# Altium PCB VT 8S LHS Top V0.1.PcbDoc
Units mm, origin at the board's own origin, x right, y up, seen from the top; angles counter-clockwise.
Board outline 148.42 x 117.33 mm, 2 copper layers (Top Layer, Bottom Layer), stack 0.049 mm thick; 6 components, 5 nets, 17 pads, 30 vias.
Unrouted connection lines stored in the file: 5.
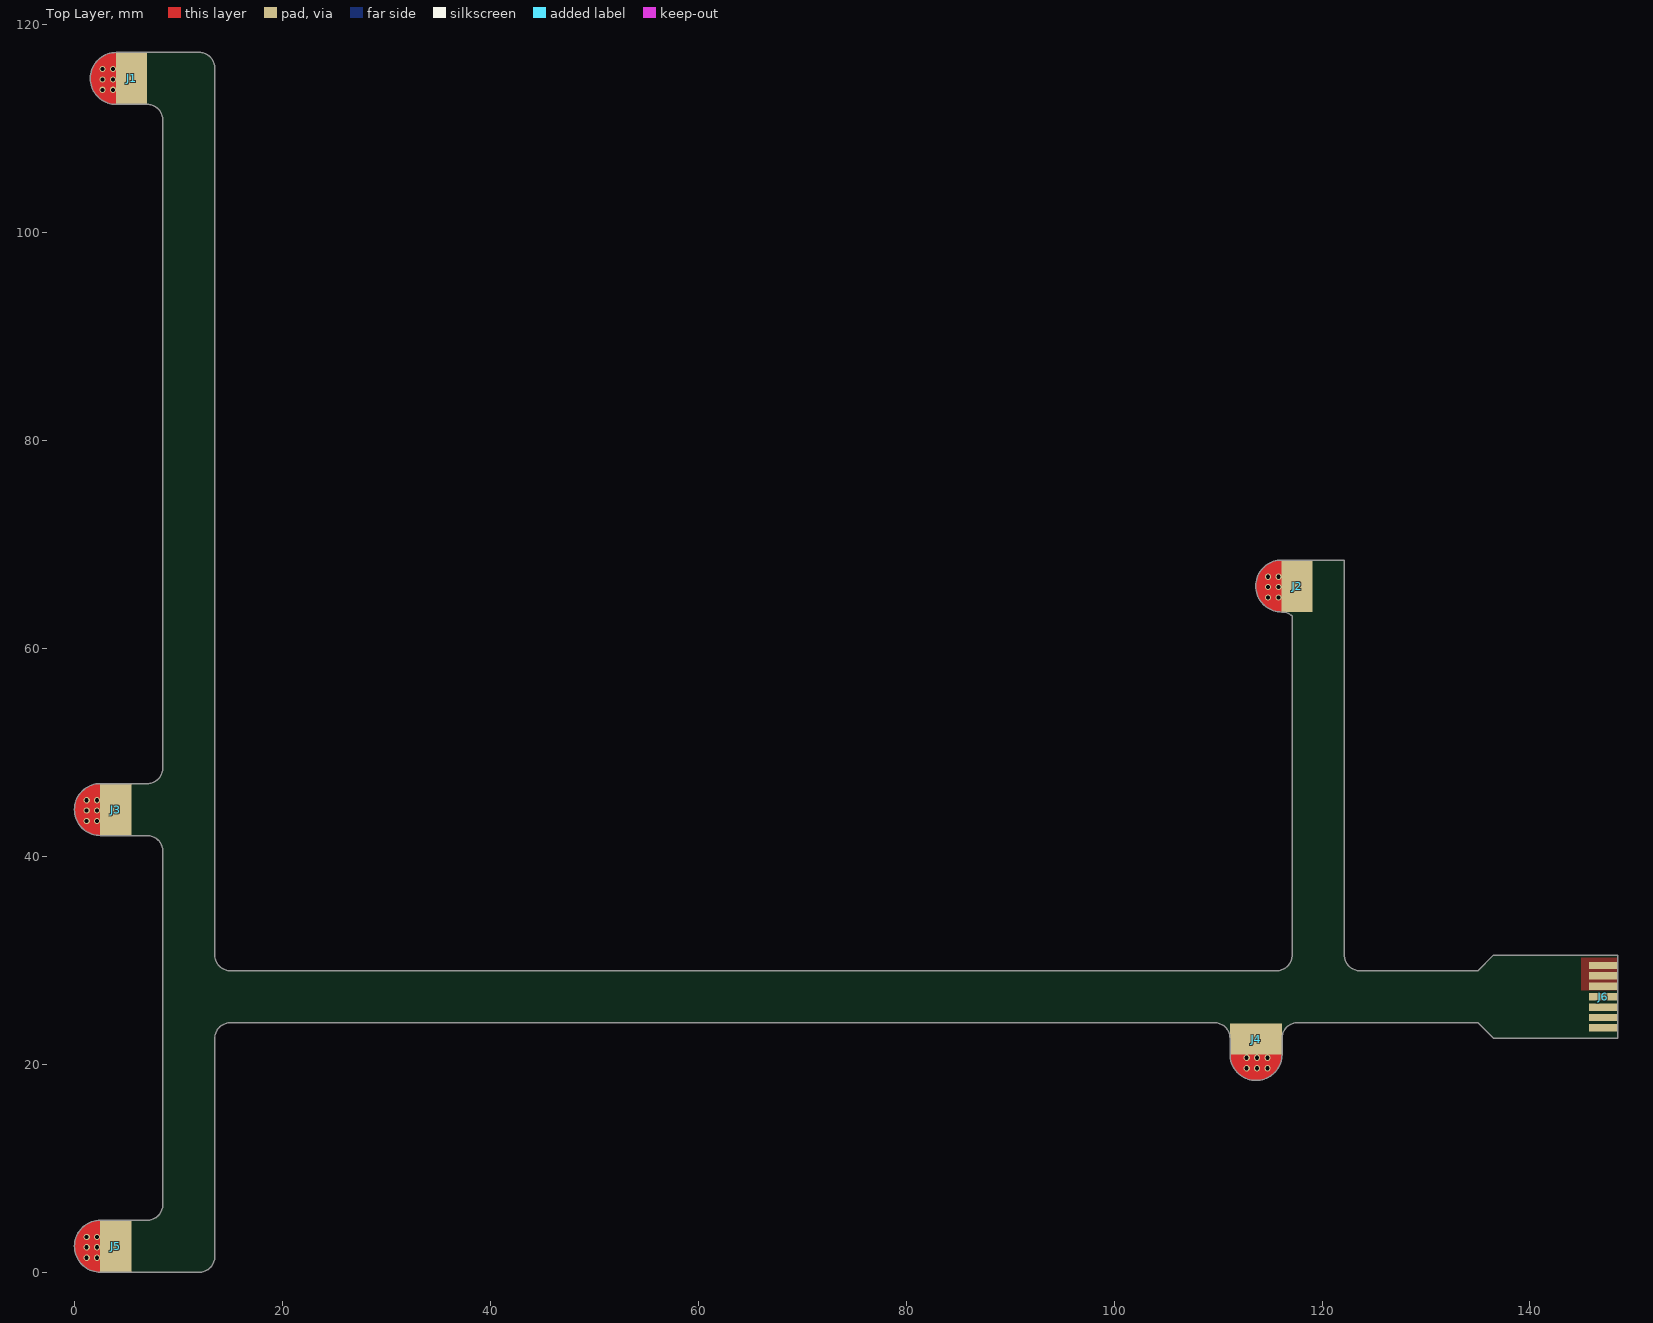
[diagram p0: Top Layer view]
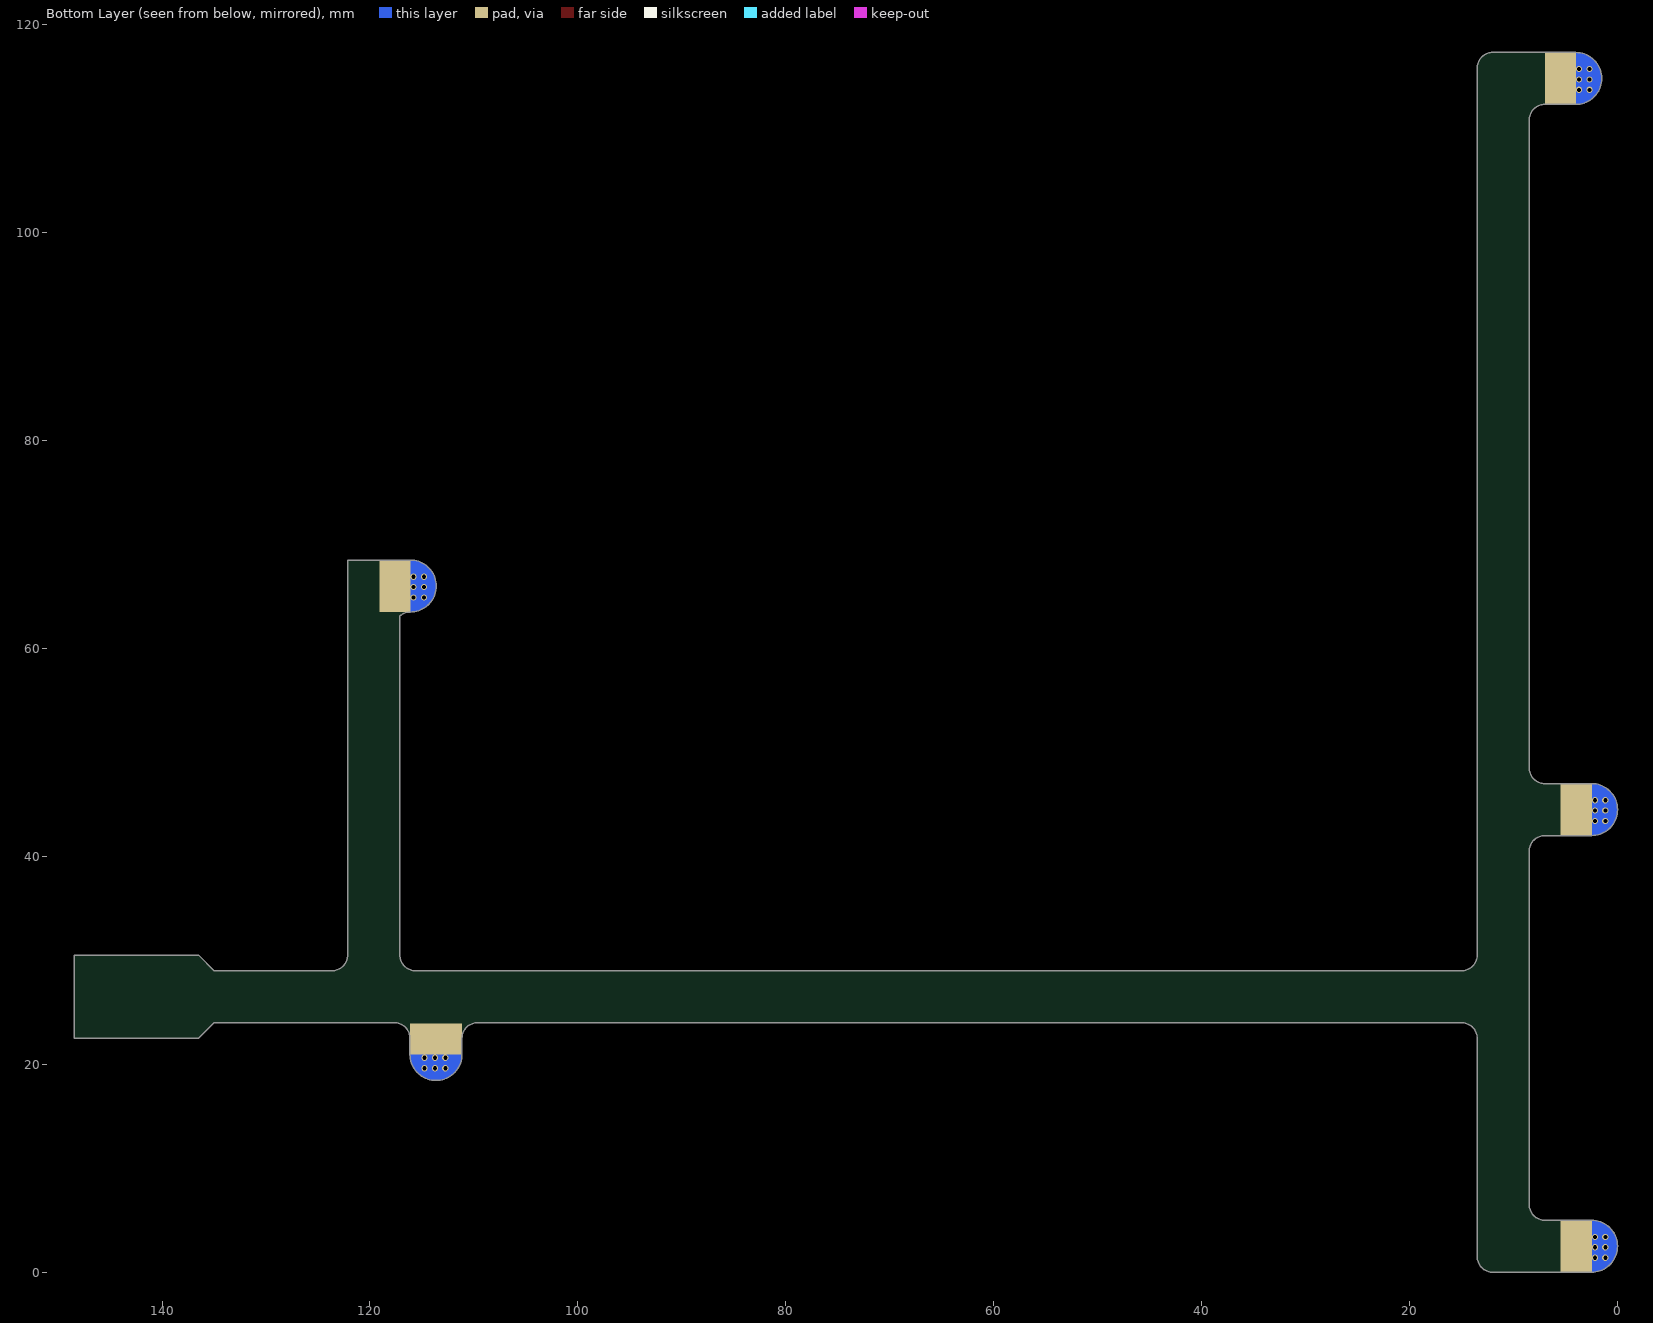
[diagram p1: Bottom Layer view, seen from below]

## Layer stack, top to bottom
Top Solder: solder mask 0.0275, Polyimide, Dk 3.5
Top Layer: signal copper 0.012
Dielectric 1: dielectric 0.025, Polyimide, Dk 3.3
Bottom Layer: signal copper 0.012
Bottom Solder: solder mask 0.0275, Polyimide, Dk 3.5

## Board outline
2.5,0 cw(c2.5,2.5) 0,2.5 cw(c2.5,2.5) 2.5,5 5.475,5 7,5 ccw(c7,6.5) 8.5,6.5 8.5,40.5 ccw(c7,40.5) 7,42 5.475,42 2.5,42 cw(c2.5,44.5) 0,44.5 cw(c2.5,44.5) 2.5,47 5.475,47 7,47 ccw(c7,48.5) 8.5,48.5 8.5,110.825 ccw(c7,110.825) 7,112.325 4.025,112.325 cw(c4.025,114.825) 1.525,114.825 cw(c4.025,114.825) 4.025,117.325 12,117.325 cw(c12,115.825) 13.5,115.825 13.5,30.5 ccw(c15,30.5) 15,29 115.625,29 ccw(c115.625,30.5) 117.125,30.5 117.128,30.503 117.128,63.115 ccw(c116.125,62) 116.125,63.5 cw(c116.125,66) 113.625,66 cw(c116.125,66) 116.125,68.5 122.15,68.5 122.15,30.5 ccw(c123.65,30.5) 123.65,29 135,29 136.5,30.5 148.425,30.5 148.425,22.5 136.5,22.5 135,24 117.65,24 ccw(c117.65,22.5) 116.15,22.5 116.15,20.95 cw(c113.65,20.95) 113.65,18.45 cw(c113.65,20.95) 111.15,20.95 111.15,22.5 ccw(c109.65,22.5) 109.65,24 15,24 ccw(c15,22.5) 13.5,22.5 13.5,1.5 cw(c12,1.5) 12,0

## Design rules (kind name [scope] priority, off if disabled: settings)
Clearance [All] p1: gap=0.152 ignorepadtopadclearanceinfootprint=FALSE
HoleToHoleClearance [All] p1: gap=0.254 allowstackedmicrovias=FALSE
PolygonConnect [All] p1: connectstyle=Direct reliefconductorwidth=0.254 reliefentries=4 polygonreliefangle="90 Angle" airgapwidth=0.254
RoutingVias [All] p1: holewidth=0.4 width=0.7 viastyle="Through Hole" minholewidth=0.2 minwidth=0.4 maxholewidth=1 maxwidth=1.2
SolderMaskExpansion SolderMaskExpansion_Via [IsVia] p1: expansion=0.102 istentingtop=TRUE
SolderMaskExpansion [All] p2: expansion=0.051 istentingtop=FALSE
Width [All] p1: maxlimit=2.54 minlimit=0.152 preferedwidth=0.254
29 further rules are at their usual default settings.

## Components (designator, comment, footprint, x,y, rotation, side; value= is the part's Value field where it differs from the comment)
J1 "Voltage Tap" "Voltage Tap" 5.5,114.825 r0 top
J2 "Voltage Tap" "Voltage Tap" 117.6,66 r0 top
J3 "Voltage Tap" "Voltage Tap" 3.975,44.5 r0 top
J4 "Voltage Tap" "Voltage Tap" 113.65,22.423 r90 top
J5 "Voltage Tap" "Voltage Tap" 3.975,2.5 r0 top
J6 "84953-7-FPC" "84953-7 - FPC" 147.05,26.5 r270 top

## Footprints (in the part's own frame and the unit in brackets; to place one, negate y for a bottom-side part, rotate by r counter-clockwise, add the part's x,y. Pads: shape width x height; smd on the part's side, far side on the other; paste and mask are expansions set on the pad)
"84953-7 - FPC" [mm] "FPC Connectors, Flex-to-Board, 7 Position, .039 in [1 mm] Centerline, FPC Connector, Top Contact"
  rect 0.71x2.7 smd: 1(-3,0) 2(-2,0) 3(-1,0) 4(0,0) 5(1,0) 6(2,0) 7(3,0)
"Voltage Tap" [mm] "Voltage Tap"
  rect 3x5 smd mask+0: 1(0,0)
  rect 3x5 smd far side mask+0: 1(0,0)
  Top Layer region: -1.475,2.5 -1.475,-2.5 -2.56,-2.252 -3.43,-1.559 -3.912,-0.556 -3.912,0.556 -3.43,1.559 -2.56,2.252 -1.475,2.5
  Bottom Layer region: -1.475,2.5 -1.475,-2.5 -2.56,-2.252 -3.43,-1.559 -3.912,-0.556 -3.912,0.556 -3.43,1.559 -2.56,2.252 -1.475,2.5
  Bottom Layer region: -1.475,2.5 -1.475,-2.5 -2.56,-2.252 -3.43,-1.559 -3.912,-0.556 -3.912,0.556 -3.43,1.559 -2.56,2.252 -1.475,2.5

## Part data
J6: "FPC Connectors, Flex-to-Board, 7 Position, .039 in [1 mm] Centerline, FPC Side Connector"

## Via types
v1: diameter 0.6, hole 0.4, Top Layer to Bottom Layer, tented both sides, 30 vias

## Nets (pads, with @x,y where several pads share a name; then routed paths per layer and width w, separated by ;. In a path a pad name is that pad's centre, name@x,y a point inside that pad or via, vN(x,y) a via of type N, cw(c..) or ccw(c..) an arc to the next point about the centre after c; other vN are vias at no path point)
NetJ1_1: J1.1 J6.1 J6.2 J6.3
  other v1: 2.7,113.725 3.7,113.725 2.7,114.725 3.7,114.725 2.7,115.725 3.7,115.725
NetJ2_1: J2.1 J6.4
  other v1: 114.8,64.9 115.8,64.9 114.8,65.9 115.8,65.9 114.8,66.9 115.8,66.9
NetJ3_1: J3.1 J6.5
  other v1: 1.175,43.4 2.175,43.4 1.175,44.4 2.175,44.4 1.175,45.4 2.175,45.4
NetJ4_1: J4.1 J6.6
  other v1: 112.75,19.623 113.75,19.623 114.75,19.623 112.75,20.623 113.75,20.623 114.75,20.623
NetJ5_1: J5.1 J6.7
  other v1: 1.175,1.4 2.175,1.4 1.175,2.4 2.175,2.4 1.175,3.4 2.175,3.4

## Polygon pours and split planes (outlines as drawn)
NetJ1_1 on Top Layer "NONET_L-01_P-001" (solid, remove dead copper, pour order 1): 144.95,30.25 148.425,30.25 148.425,27.1 144.95,27.1

## Silkscreen, mask and mechanical layers (free items; w line width, h text height)
Board Shape:
  lines w0.05: 5.475,0 12,0 ccw(c12,1.5) 13.5,1.5 13.5,22.5 cw(c15,22.5) 15,24 109.65,24 cw(c109.65,22.5) 111.15,22.5 111.15,20.95 ccw(c113.65,20.95) 113.65,18.45 ccw(c113.65,20.95) 116.15,20.95 116.15,22.5 cw(c117.65,22.5) 117.65,24 135,24 135.15,23.85 136.5,22.5 148.425,22.5 148.425,30.5 136.5,30.5 135,29 123.65,29 cw(c123.65,30.5) 122.15,30.5 122.15,68.5 116.725,68.5 116.125,68.5 ccw(c116.125,66) 113.625,66 ccw(c116.125,66) 116.125,63.5 cw(c116.125,62) 117.128,63.115 117.128,30.503 ; 5.475,5 7,5 ccw(c7,6.5) 8.5,6.5 8.5,40.5 ccw(c7,40.5) 7,42 5.475,42 ; 5.475,47 7,47 ccw(c7,48.5) 8.5,48.5 8.5,110.825 ccw(c7,110.825) 7,112.325 ; 7,117.325 12,117.325 cw(c12,115.825) 13.5,115.825 13.5,30.5 ccw(c15,30.5) 15,29 115.625,29 ccw(c115.625,30.5) 117.125,30.5
Mechanical Colab:
  lines w0.013: 8.5,90.5 13.5,90.5 ; 8.5,93.72 13.5,93.72 ; 16,24 16,29 ; 19.22,24 19.22,29 ; 89.92,24 89.92,29 ; 93.14,24 93.14,29 ; 0,0 0,5 8.5,5 8.5,42 0,42 0,47 8.5,47 8.5,112.32 6,112.32 6,117.32 13.5,117.32 13.5,29 117.14,29 117.14,63.5 113.64,63.5 113.64,68.5 122.14,68.5 122.14,29 146.14,29 146.14,24 116.14,24 116.14,21.5 111.14,21.5 111.14,24 13.5,24 13.5,0 0,0

## Text inside footprints (layer, text, board x,y; h text height)
J6: Stiffener Backing "Total FPC width on stiffener / 0.3mm +- 0.05mm" at 148.85,31.475 h1 r270